# Altium PCB motor_driver2.PcbDoc
Units mm, origin at the board's own origin, x right, y up, seen from the top; angles counter-clockwise.
Board outline 27.3 x 14.1 mm, 2 copper layers (Top Layer, Bottom Layer); 20 components, 20 nets, 68 pads, 10 vias.
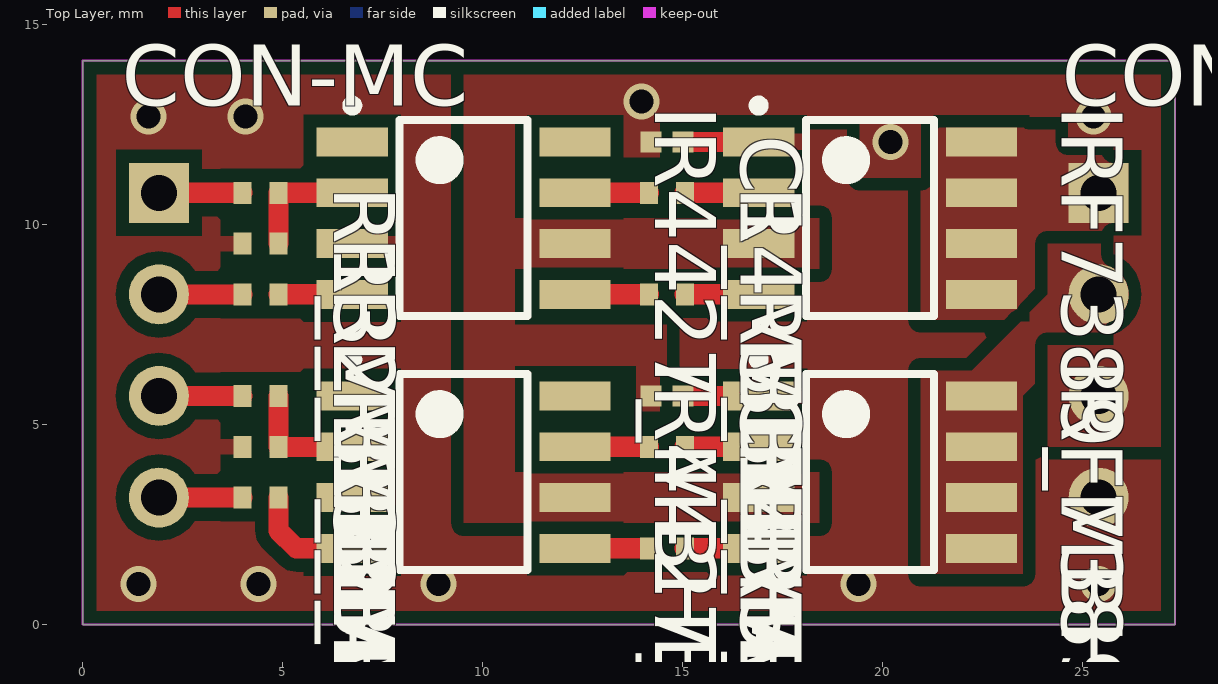
[diagram p0: Top Layer view]
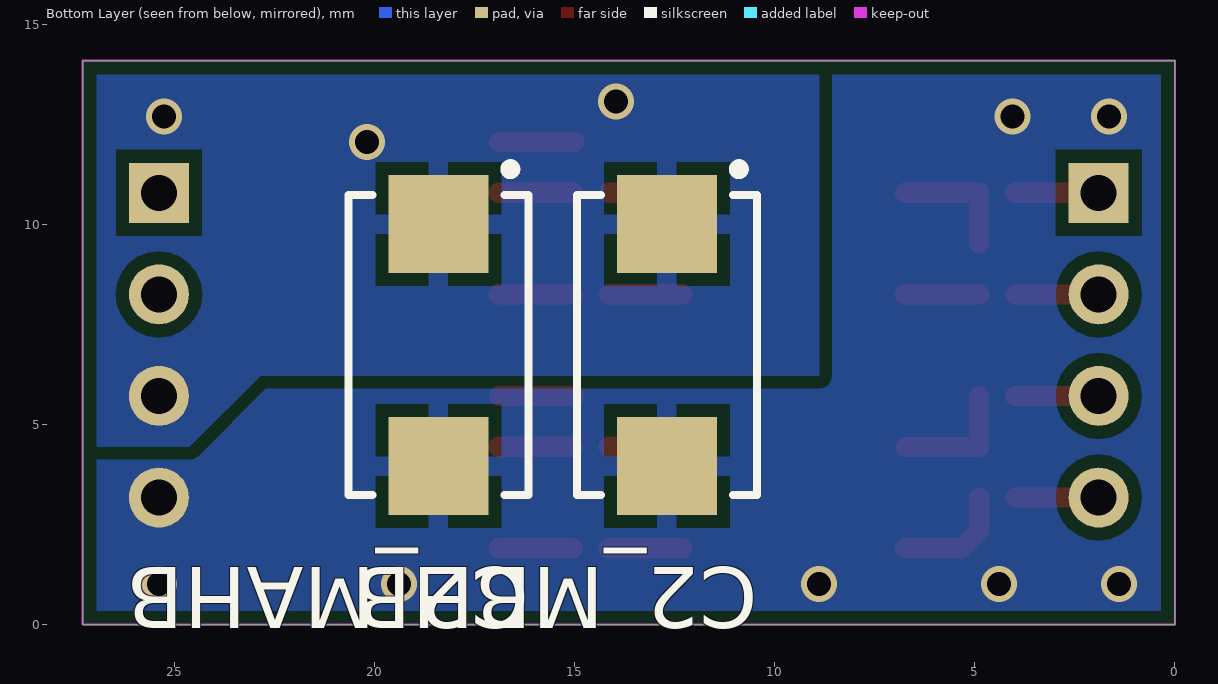
[diagram p1: Bottom Layer view, seen from below]

## Layer stack, top to bottom
Top Solder: solder mask 0.0102, Solder Resist, Dk 3.5
Top Layer: signal copper 0.0356
Dielectric 1: dielectric 0.32, FR-4, Dk 4.8
Bottom Layer: signal copper 0.0356
Bottom Solder: solder mask 0.0102, Solder Resist, Dk 3.5

## Board outline
0,0 27.305,0 27.305,14.097 0,14.097

## Design rules (kind name [scope] priority, off if disabled: settings)
Clearance Clearance_1 [InNamedPolygon('VCC_L02_P075')] p1 off: gap=0.16
Clearance [All] p2: gap=0.32 except(0.28: Track-SMDPad SMDPad-SMDPad)
MinimumSolderMaskSliver [All] p1 off: minsoldermaskwidth=0.254
PlaneConnect [All] p1: planeconnectstyle=Relief reliefexpansion=0.508 reliefentries=4 reliefconductorwidth=0.5 reliefairgap=0.254
PolygonConnect [IsVia] p1: connectstyle=Direct reliefconductorwidth=0.254 reliefentries=4 polygonreliefangle="90 Angle" airgapwidth=0.254
PolygonConnect "Schematic Polygon Connect Style_9" [InNet('MA_MBHB')] p2: connectstyle=Direct reliefconductorwidth=0.254 reliefentries=4 polygonreliefangle="45 Angle" airgapwidth=0.254
PolygonConnect "Schematic Polygon Connect Style_8" [InNet('MA')] p3: connectstyle=Direct reliefconductorwidth=0.254 reliefentries=4 polygonreliefangle="45 Angle" airgapwidth=0.254
PolygonConnect "Schematic Polygon Connect Style_7" [InComponent('C2_MAHB')] p4: connectstyle=Relief reliefconductorwidth=0.5 reliefentries=4 polygonreliefangle="90 Angle" airgapwidth=0.32
PolygonConnect "Schematic Polygon Connect Style" [InComponent('C2_MBHB')] p5: connectstyle=Relief reliefconductorwidth=0.5 reliefentries=4 polygonreliefangle="90 Angle" airgapwidth=0.32
PolygonConnect PolygonConnect_2 [IsThruPin] p6: connectstyle=Direct reliefconductorwidth=0.5 reliefentries=4 polygonreliefangle="90 Angle" airgapwidth=0.254
PolygonConnect "Schematic Polygon Connect Style_6" [InNet('NetIC2_2')] p7 off: connectstyle=Direct reliefconductorwidth=0.254 reliefentries=4 polygonreliefangle="45 Angle" airgapwidth=0.254
PolygonConnect "Schematic Polygon Connect Style_5" [InNet('NetIC2_4')] p8 off: connectstyle=Direct reliefconductorwidth=0.254 reliefentries=4 polygonreliefangle="45 Angle" airgapwidth=0.254
PolygonConnect "Schematic Polygon Connect Style_4" [InNet('NetIC4_2')] p9 off: connectstyle=Direct reliefconductorwidth=0.254 reliefentries=4 polygonreliefangle="45 Angle" airgapwidth=0.254
PolygonConnect "Schematic Polygon Connect Style_3" [InNet('NetIC4_4')] p10 off: connectstyle=Direct reliefconductorwidth=0.254 reliefentries=4 polygonreliefangle="45 Angle" airgapwidth=0.254
PolygonConnect "Schematic Polygon Connect Style_2" [InNet('NetIC4_5')] p11 off: connectstyle=Direct reliefconductorwidth=0.254 reliefentries=4 polygonreliefangle="45 Angle" airgapwidth=0.254
PolygonConnect "Schematic Polygon Connect Style_1" [InNet('MA')] p12 off: connectstyle=Direct reliefconductorwidth=0.254 reliefentries=4 polygonreliefangle="45 Angle" airgapwidth=0.254
PolygonConnect PolygonConnect_1 [InNet('VCC')] p13: connectstyle=Direct reliefconductorwidth=0.5 reliefentries=4 polygonreliefangle="90 Angle" airgapwidth=0.254
PolygonConnect PolygonConnect_3 [All] p14: connectstyle=Relief reliefconductorwidth=0.4 reliefentries=4 polygonreliefangle="90 Angle" airgapwidth=0.32
RoutingVias [All] p1: holewidth=0.3 width=0.6 viastyle="Through Hole" minholewidth=0.2 minwidth=0.5 maxholewidth=0.4 maxwidth=1.27
SilkToSilkClearance [All] p1 off: silktosilkclearance=0.254
SilkToSolderMaskClearance [IsPad] p1 off: minsilkscreentomaskgap=0.254 clearancetoexposedcopper=TRUE
SolderMaskExpansion [All] p1: expansion=0.102
Width [All] p1: maxlimit=1 minlimit=0.254 preferedwidth=0.254
26 further rules are at their usual default settings.

## Classes and differential pairs
channel class half_bridge: MAHB MBHB
component class MBHB: C1_MBHB C2_MBHB IR4427_MBHB IRF7389_MBHB R1_MBHB R2_MBHB R3_MBHB R4_MBHB R5_MBHB
component class MAHB: C1_MAHB C2_MAHB IR4427_MAHB IRF7389_MAHB R1_MAHB R2_MAHB R3_MAHB R4_MAHB R5_MAHB
component class motor_driver: CON-MC CON-MOTOR R4 R5

## Components (designator, comment, footprint, x,y, rotation, side; value= is the part's Value field where it differs from the comment)
C1_MAHB "100pF" 0402-CAP 14.605,5.715 r0 top (schematic designator C1)
C1_MBHB "100pF" 0402-CAP 14.605,12.065 r0 top (schematic designator C1)
C2_MAHB "4,7UF" PCBComponent 18.415,6.985 r270 bottom (schematic designator C2)
C2_MBHB "4,7UF" PCBComponent 12.7,6.985 r270 bottom (schematic designator C2)
CON-MC "22032041" 04x01_Conector_Male 1.905,6.985 r90 top
CON-MOTOR "22032041" 04x01_Conector_Male 25.4,6.985 r90 top
IR4427_MAHB "IR4427STRPBF" IR4427-PCB 9.525,3.81 r0 top (schematic designator IR4427)
IR4427_MBHB "IR4427STRPBF" IR4427-PCB 9.525,10.16 r0 top (schematic designator IR4427)
IRF7389_MAHB "IRF7389TRPBF" IRF7389-PCB 19.685,3.81 r0 top (schematic designator IRF7389)
IRF7389_MBHB "IRF7389TRPBF" IRF7389-PCB 19.685,10.16 r0 top (schematic designator IRF7389)
R1_MAHB "330R" 0402-RES-HD 4.445,5.715 r0 top (schematic designator R1)
R1_MBHB "330R" 0402-RES-HD 4.445,10.795 r0 top (schematic designator R1)
R2_MAHB "330R" 0402-RES-HD 4.445,3.175 r0 top (schematic designator R2)
R2_MBHB "330R" 0402-RES-HD 4.445,8.255 r0 top (schematic designator R2)
R3_MAHB "10K" 0402-RES-HD 4.445,4.445 r0 top (schematic designator R3)
R3_MBHB "10K" 0402-RES-HD 4.445,9.525 r0 top (schematic designator R3)
R4_MAHB "10R" 0402-RES-HD 14.605,4.445 r0 top (schematic designator R4)
R4_MBHB "10R" 0402-RES-HD 14.605,10.795 r0 top (schematic designator R4)
R5_MAHB "10R" 0402-RES-HD 14.605,1.905 r0 top (schematic designator R5)
R5_MBHB "10R" 0402-RES-HD 14.605,8.255 r0 top (schematic designator R5)

## Footprints (in the part's own frame and the unit in brackets; to place one, negate y for a bottom-side part, rotate by r counter-clockwise, add the part's x,y. Pads: shape width x height; smd on the part's side, far side on the other; paste and mask are expansions set on the pad)
04x01_Conector_Male [mm] "0022032041"
  round 1.5 hole 0.9: 0(-3.81,0) 1(-1.27,0) 2(1.27,0)
  rect 1.5x1.5 hole 0.9: 3(3.81,0)
  body extent -4.95,-1.18 4.95,1.18, height 10.84
0402-CAP [mm] "Chip Capacitor, Body 1.0x0.5mm, Height 0.6mm, IPC Medium Density"
  rect 0.52x0.52 smd: 1(-0.4,0) 2(0.4,0)
  body extent -0.55,-0.3 0.55,0.3, height 0.33
0402-RES-HD [mm] "Chip Resistor, Body 1.0x0.5mm, IPC High Density"
  rect 0.45x0.55 smd: 1(-0.45,0) 2(0.45,0)
  body extent -0.52,-0.27 0.53,0.28, height 0.4
IR4427-PCB [mm] "SOIC, 8-Leads, Body 4,85x3,90mm, Pitch 1,27mm, IPC Medium Density"
  rect 1.78x0.72 smd: 1(-2.785,1.905) 2(-2.785,0.635) 3(-2.785,-0.635) 4(-2.785,-1.905) 5(2.785,-1.905) 6(2.785,-0.635) 7(2.785,0.635) 8(2.785,1.905)
  silkscreen extent -2.91,-2.45 1.6,2.94, body extent -2,-2.45 2,2.45, height 1.75
IRF7389-PCB [mm] "SOIC, 8-Leads, Body 4,85x3,90mm, Pitch 1,27mm, IPC Medium Density"
  rect 1.78x0.72 smd: 1(-2.785,1.905) 2(-2.785,0.635) 3(-2.785,-0.635) 4(-2.785,-1.905) 5(2.785,-1.905) 6(2.785,-0.635) 7(2.785,0.635) 8(2.785,1.905)
  silkscreen extent -2.91,-2.45 1.6,2.94, body extent -2,-2.45 2,2.45, height 1.75
PCBComponent [mm]
  rect 2.45x2.5 smd: 1(-3.025,0) 2(3.025,0)
  silkscreen extent -4.52,-2.25 3.75,2.25, body extent -3.75,-2.25 3.75,2.25, height 2.9

## Part data
C1_MAHB C1_MBHB: library part CC0402-100pF-A.2, "CAP CER 100PF 50V 1% NP0 0402"
C2_MAHB C2_MBHB: library part TPSD106K035R0300-01.A.1, "Tantalum Capacitors - Solid SMD 10uF 35V 10% L ESR"
CON-MC CON-MOTOR: library part 04x01_Conector_Male-SCH, "CONN HEADER 4POS .100 VERT TIN"
IR4427_MAHB IR4427_MBHB: library part IR4427, "IC DRIVER DUAL LOW SIDE 8-DIP"
IRF7389_MAHB IRF7389_MBHB: library part IRF7389, "MOSFET N/P-CH 30V 8-SOIC"
R1_MAHB R1_MBHB R2_MAHB R2_MBHB: library part R0402-330R-7, "RES 330 OHM 1/10W 1% 0402 SMD"
R3_MAHB R3_MBHB: library part R0402-10K-10, "RES 10K OHM 1/10W 1% 0402 SMD"
R4_MAHB R4_MBHB R5_MAHB R5_MBHB: library part R0402-10R-6, "RES 10 OHM 1/10W 1% 0402 SMD"

## Via types
v1: diameter 0.9, hole 0.6, Top Layer to Bottom Layer, 10 vias

## Nets (pads, with @x,y where several pads share a name; then routed paths per layer and width w, separated by ;. In a path a pad name is that pad's centre, name@x,y a point inside that pad or via, vN(x,y) a via of type N, cw(c..) or ccw(c..) an arc to the next point about the centre after c; other vN are vias at no path point)
GND: C1_MAHB.2 C1_MBHB.2 C2_MAHB.2 C2_MBHB.2 CON-MOTOR.0 IR4427_MAHB.3 IR4427_MBHB.3 IRF7389_MAHB.1 IRF7389_MBHB.1 R3_MAHB.1 R3_MBHB.1 | length 3.8
  Top Layer w0.5: C1_MAHB.2 IRF7389_MAHB.1 ; C1_MBHB.2 IRF7389_MBHB.1
  other v1: 1.397,1.016 4.397,1.016 8.897,1.016 19.397,1.016 25.397,1.016 1.651,12.7 4.064,12.7
MA: CON-MOTOR.2 IRF7389_MAHB.5 IRF7389_MAHB.6 IRF7389_MAHB.7 IRF7389_MAHB.8
MA_MBHB: CON-MOTOR.3 IRF7389_MBHB.5 IRF7389_MBHB.6 IRF7389_MBHB.7 IRF7389_MBHB.8
MAH: CON-MC.0 R2_MAHB.1 | length 2.1
  Top Layer w0.508: CON-MC.0 R2_MAHB.1
MAL: CON-MC.1 R1_MAHB.1 | length 2.1
  Top Layer w0.5: CON-MC.1 R1_MAHB.1
MBH: CON-MC.2 R2_MBHB.1 | length 2.1
  Top Layer w0.5: CON-MC.2 R2_MBHB.1
MBL: CON-MC.3 R1_MBHB.1 | length 2.1
  Top Layer w0.508: CON-MC.3 R1_MBHB.1
NetIR4427_MAHB_2: IR4427_MAHB.2 R1_MAHB.2 R3_MAHB.2 | length 3.1
  Top Layer w0.5: R1_MAHB.2 R3_MAHB.2 IR4427_MAHB.2
NetIR4427_MAHB_4: IR4427_MAHB.4 R2_MAHB.2 | length 2.9
  Top Layer w0.508: R2_MAHB.2 4.895,2.344 5.334,1.905 IR4427_MAHB.4
NetIR4427_MAHB_5: IR4427_MAHB.5 R5_MAHB.1 | length 1.8
  Top Layer w0.508: IR4427_MAHB.5 R5_MAHB.1
NetIR4427_MAHB_7: IR4427_MAHB.7 R4_MAHB.1 | length 1.8
  Top Layer w0.508: IR4427_MAHB.7 R4_MAHB.1
NetIR4427_MBHB_2: IR4427_MBHB.2 R1_MBHB.2 R3_MBHB.2 | length 3.1
  Top Layer w0.5: R3_MBHB.2 R1_MBHB.2
  Top Layer w0.508: R1_MBHB.2 IR4427_MBHB.2
NetIR4427_MBHB_4: IR4427_MBHB.4 R2_MBHB.2 | length 1.8
  Top Layer w0.508: R2_MBHB.2 IR4427_MBHB.4
NetIR4427_MBHB_5: IR4427_MBHB.5 R5_MBHB.1 | length 1.8
  Top Layer w0.508: IR4427_MBHB.5 R5_MBHB.1
NetIR4427_MBHB_7: IR4427_MBHB.7 R4_MBHB.1 | length 1.8
  Top Layer w0.508: IR4427_MBHB.7 R4_MBHB.1
NetIRF7389_MAHB_2: IRF7389_MAHB.2 R4_MAHB.2 | length 1.8
  Top Layer w0.508: R4_MAHB.2 IRF7389_MAHB.2
NetIRF7389_MAHB_4: IRF7389_MAHB.4 R5_MAHB.2 | length 1.8
  Top Layer w0.508: R5_MAHB.2 IRF7389_MAHB.4
NetIRF7389_MBHB_2: IRF7389_MBHB.2 R4_MBHB.2 | length 1.8
  Top Layer w0.508: R4_MBHB.2 IRF7389_MBHB.2
NetIRF7389_MBHB_4: IRF7389_MBHB.4 R5_MBHB.2 | length 1.8
  Top Layer w0.508: R5_MBHB.2 IRF7389_MBHB.4
VCC: C1_MAHB.1 C1_MBHB.1 C2_MAHB.1 C2_MBHB.1 CON-MOTOR.1 IR4427_MAHB.6 IR4427_MBHB.6 IRF7389_MAHB.3 IRF7389_MBHB.3
  other v1: 20.193,12.065 25.273,12.7 13.97,13.081
pads on no net: IR4427_MAHB.1 IR4427_MAHB.8 IR4427_MBHB.1 IR4427_MBHB.8

## Polygon pours and split planes (outlines as drawn)
GND on Top Layer "Top Layer-No Net" (solid, remove dead copper, pour order 90): 0,14.097 27.305,14.097 27.305,0 0,0
MA_MBHB on Top Layer "Top Layer-No Net" (solid, remove dead copper, pour order 78): 20.955,7.62 20.955,12.7 26.67,12.7 26.67,9.525 25.4,9.525 24.13,8.255 24.13,7.62
VCC on Top Layer "Top Layer-No Net" (solid, remove dead copper, pour order 73): 24.13,4.445 24.13,6.985 25.781,6.985 25.781,12.065 24.638,12.065 24.638,12.7 25.781,12.7 20.955,12.7 20.955,11.176 19.431,11.176 19.431,12.7 14.605,12.7 14.605,11.684 13.335,11.684 13.335,12.7 10.795,12.7 10.795,10.16 18.415,10.16 18.415,8.89 10.795,8.89 10.795,7.493 14.605,7.493 14.605,6.477 14.605,5.334 13.843,5.334 13.843,6.477 10.795,6.477 10.795,3.81 18.415,3.81 18.415,2.54 9.525,2.54 9.525,13.97 27.305,13.97 27.305,4.445
MA on Top Layer "Top Layer-No Net" (solid, remove dead copper, pour order 74): 26.289,9.525 24.13,9.525 24.13,8.255 22.225,6.35 20.955,6.35 20.955,1.27 23.495,1.27 23.495,5.715 24.765,6.985 26.289,6.985
VCC on Bottom Layer "Top Layer-No Net" (solid, remove dead copper, pour order 77): 27.305,4.445 24.638,4.445 22.86,6.223 8.89,6.223 8.89,6.985 8.89,14.097 27.305,14.097
GND on Bottom Layer "Top Layer-No Net" (solid, remove dead copper, pour order 94): 27.305,0 27.305,14.097 0,14.097 0,0

## Keep-outs
Keep-Out Layer:
  the board outline again, w0.05